# Altium PCB AT short bus ( 7 x 4.8 inches).PCBDOC
Units mil, origin at the board's own origin, x right, y up, seen from the top; angles counter-clockwise.
Board outline 7000 x 4800 mil, 10 copper layers (TopLayer, MidLayer1, MidLayer2, MidLayer3, MidLayer4, MidLayer5, MidLayer6, MidLayer7, MidLayer8, BottomLayer); 7 components, 5 nets, 28 pads, 0 vias.
Unrouted connection lines stored in the file: 15.
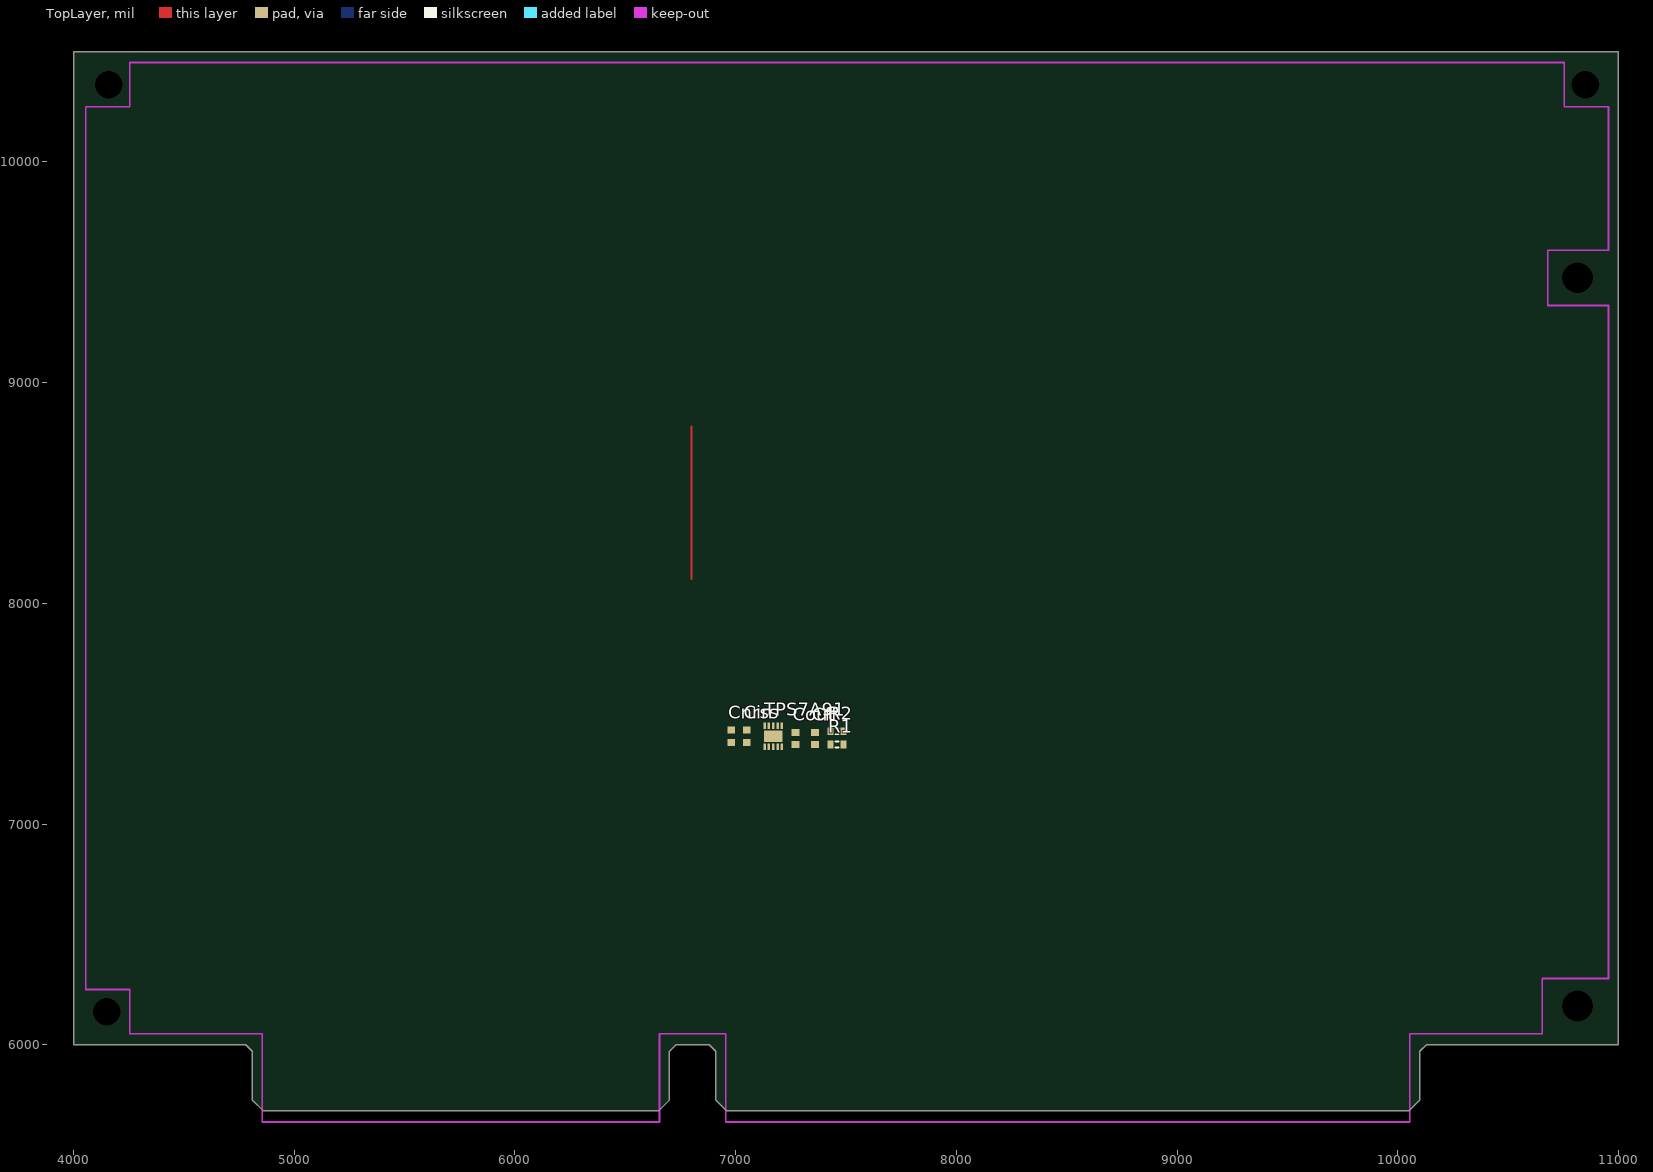
[diagram p0: TopLayer view]
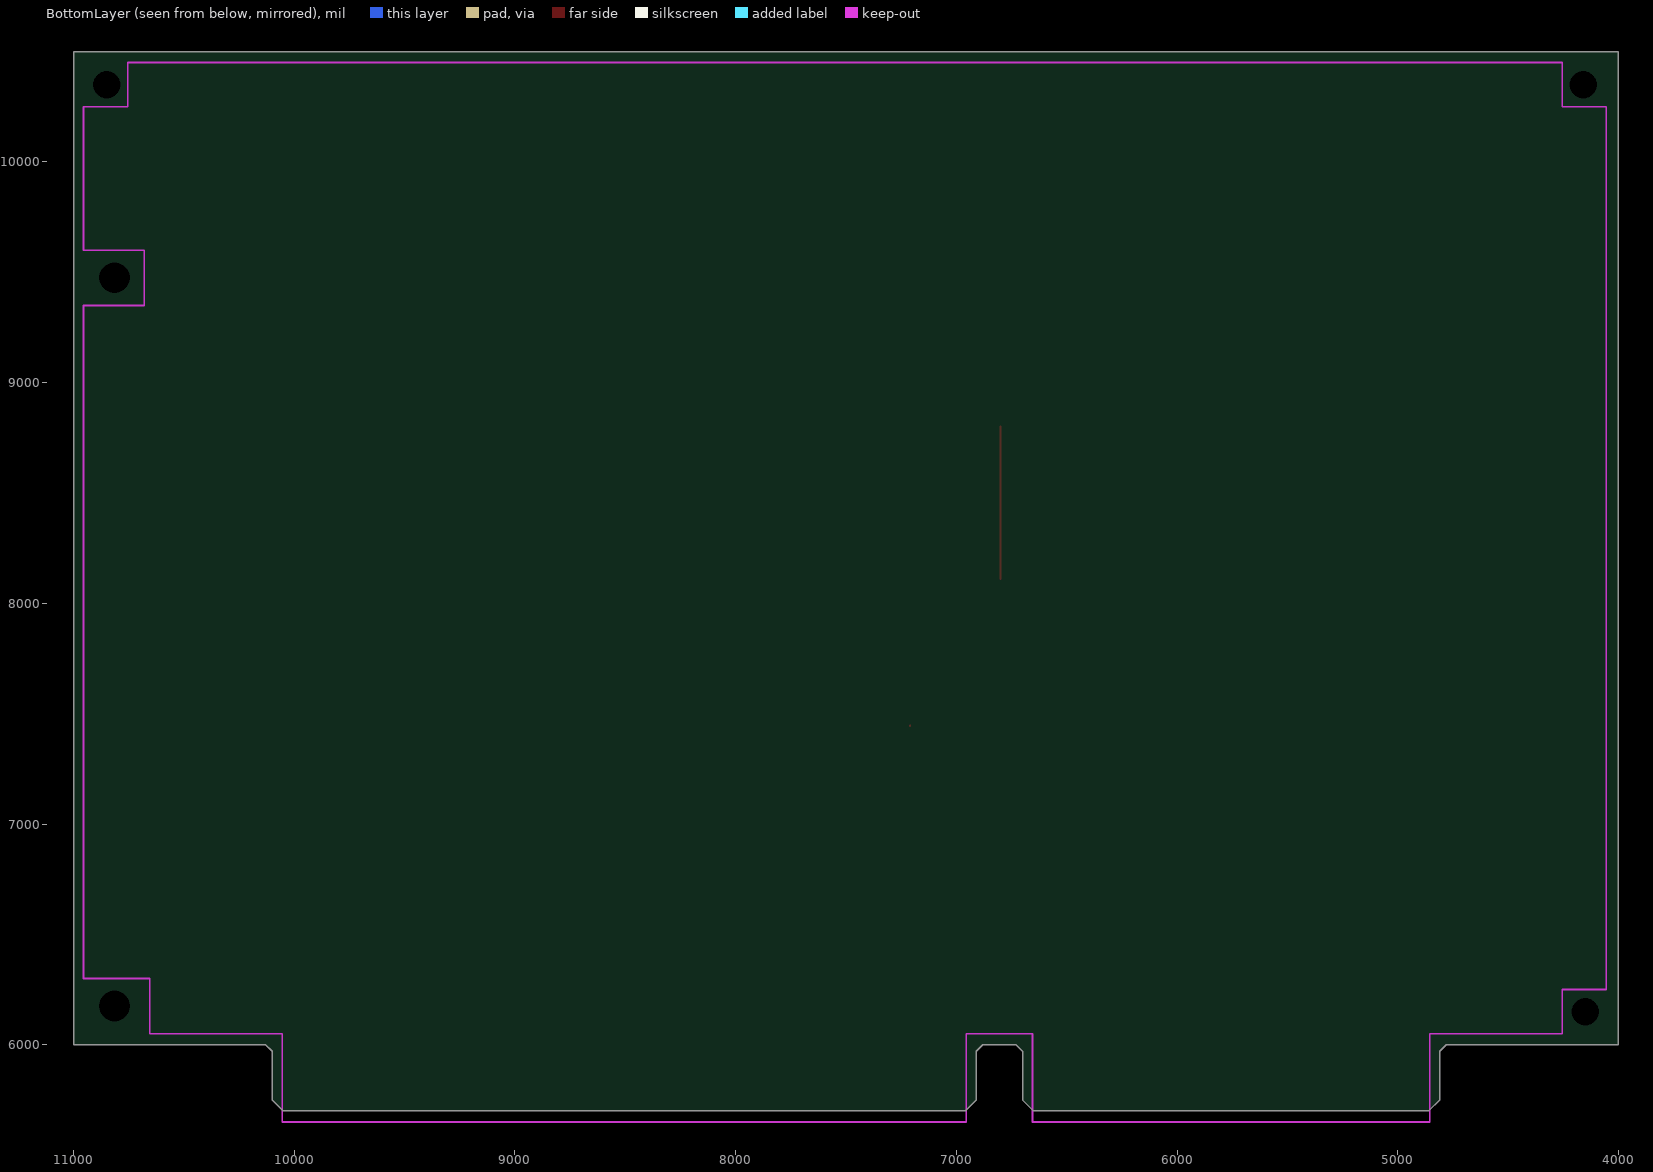
[diagram p1: BottomLayer view, seen from below]
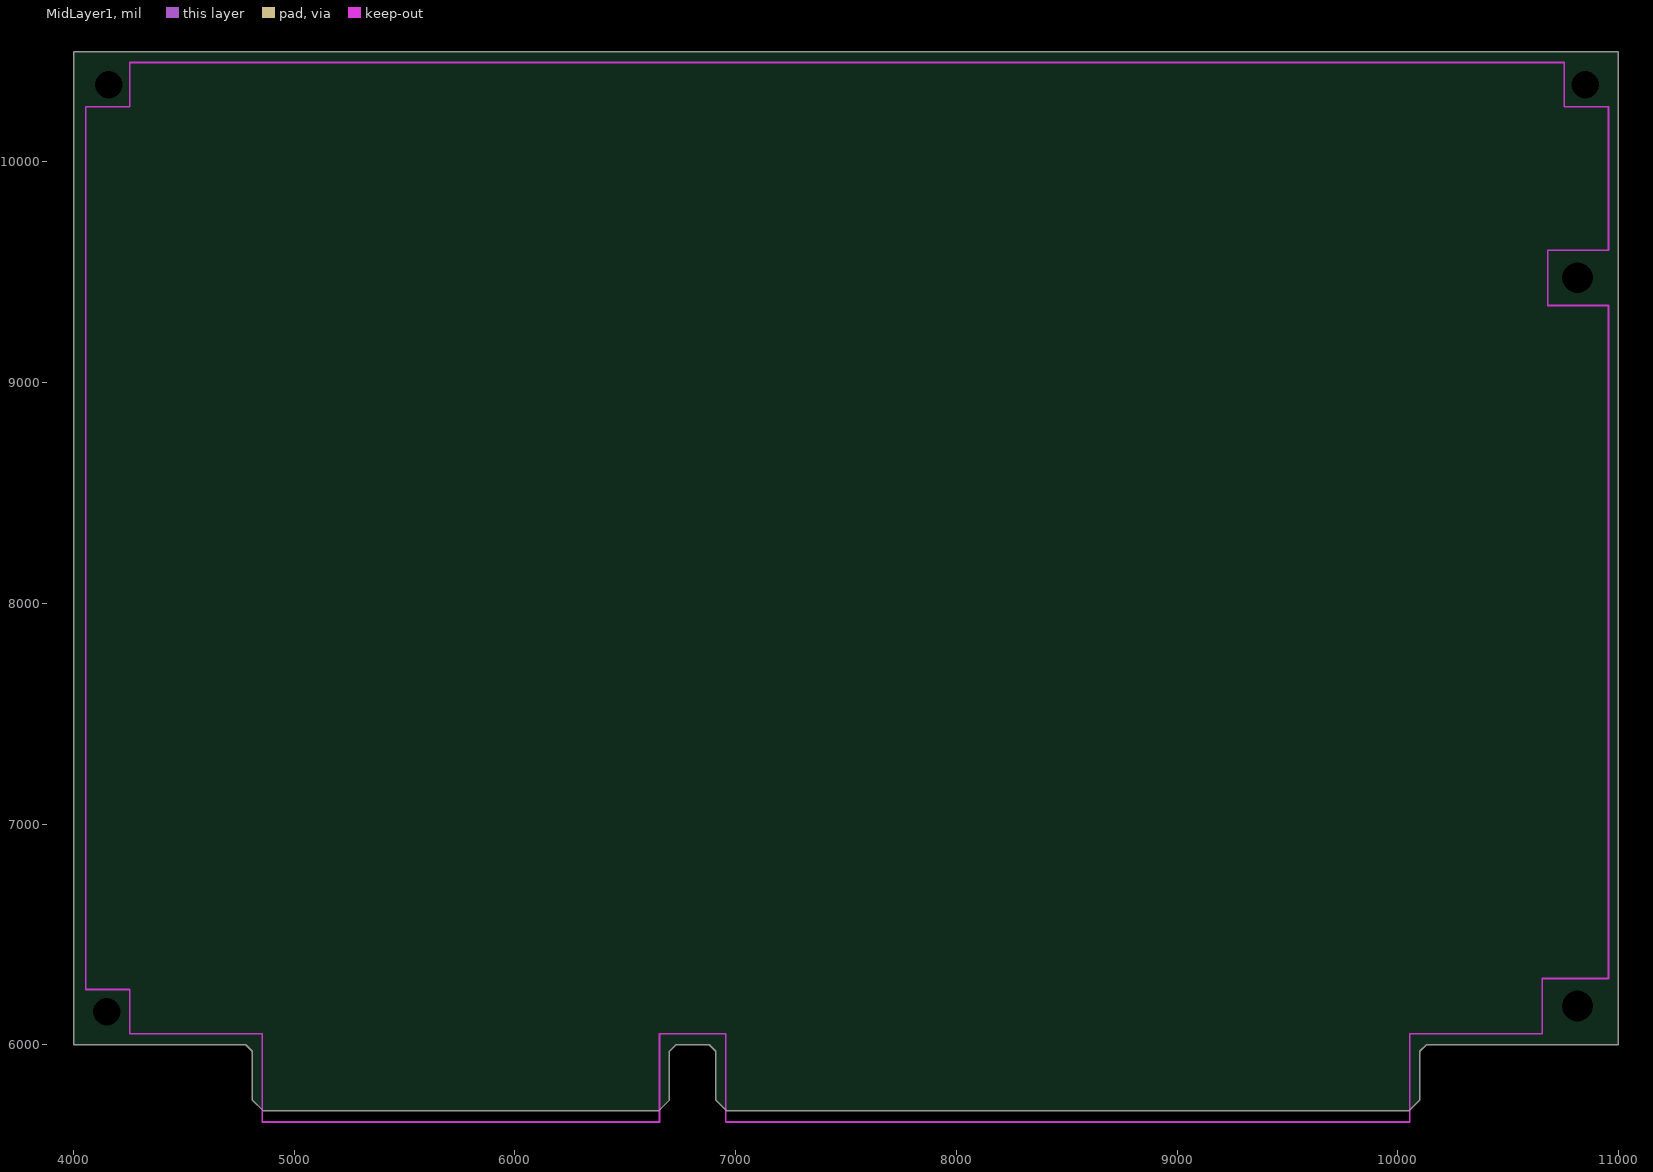
[diagram p2: MidLayer1]
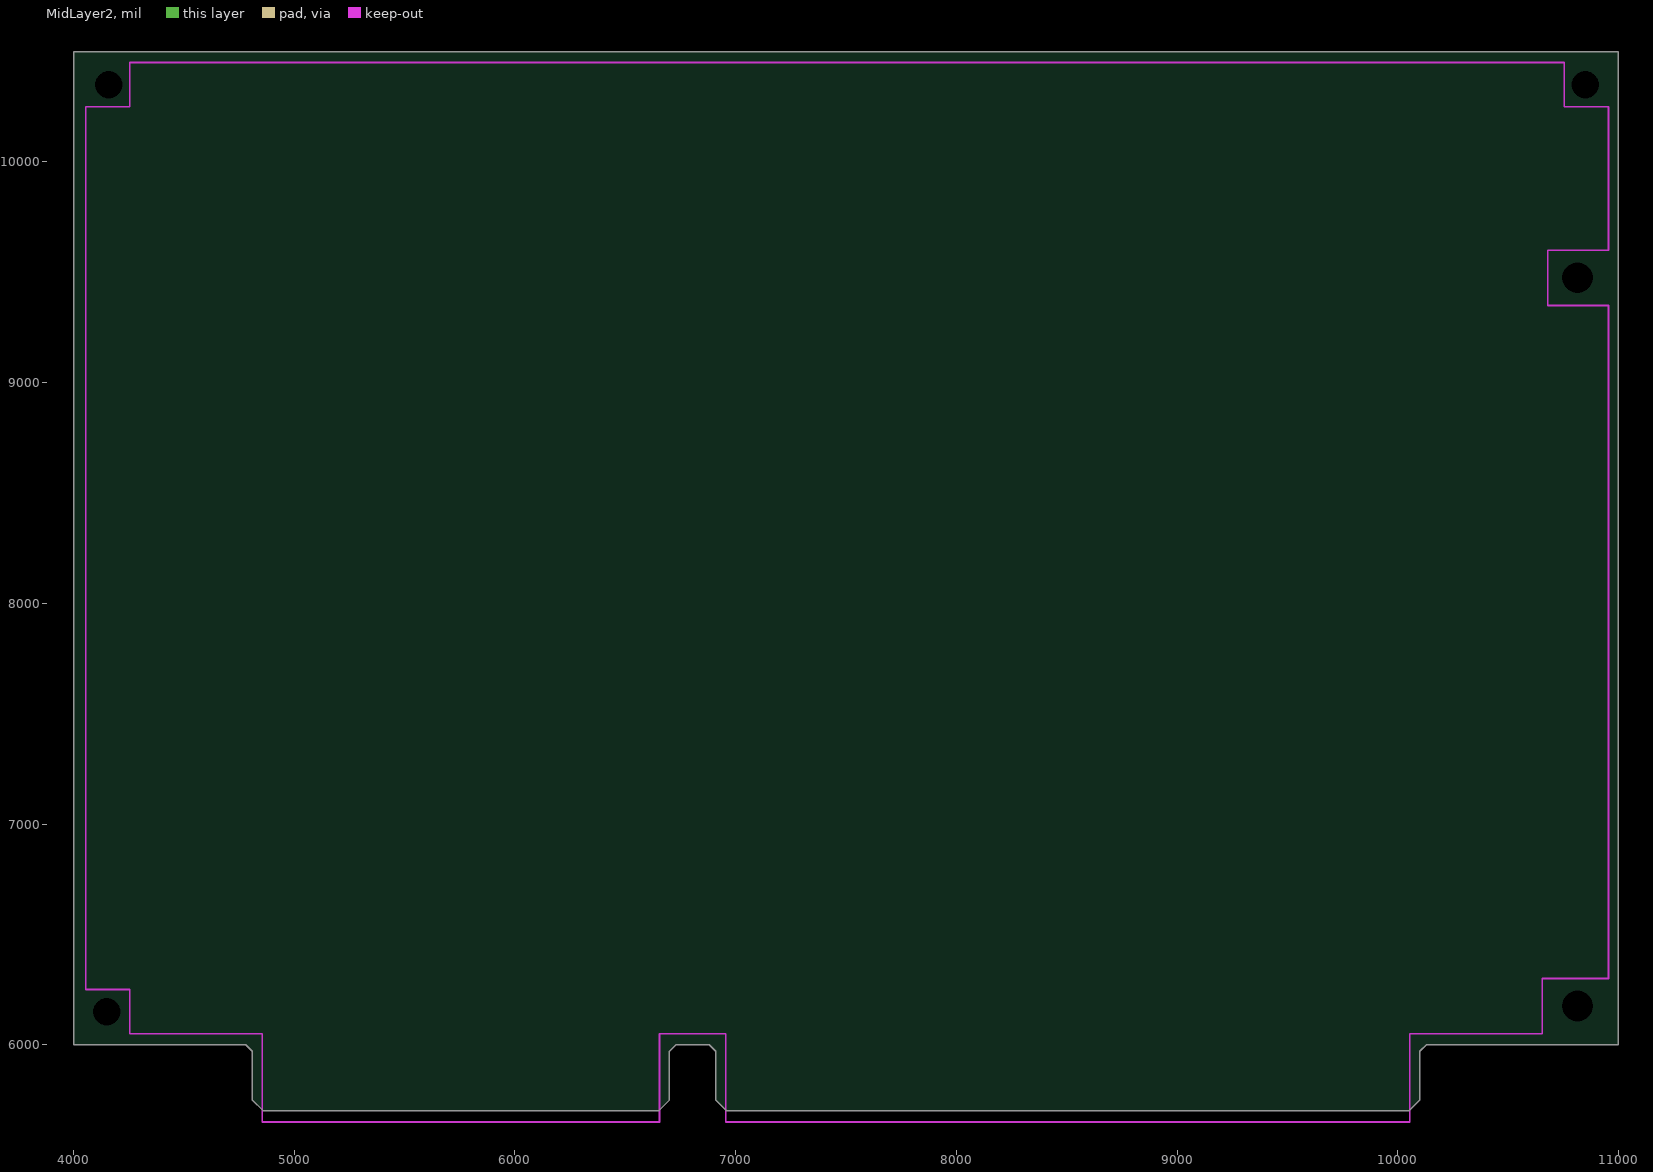
[diagram p3: MidLayer2]
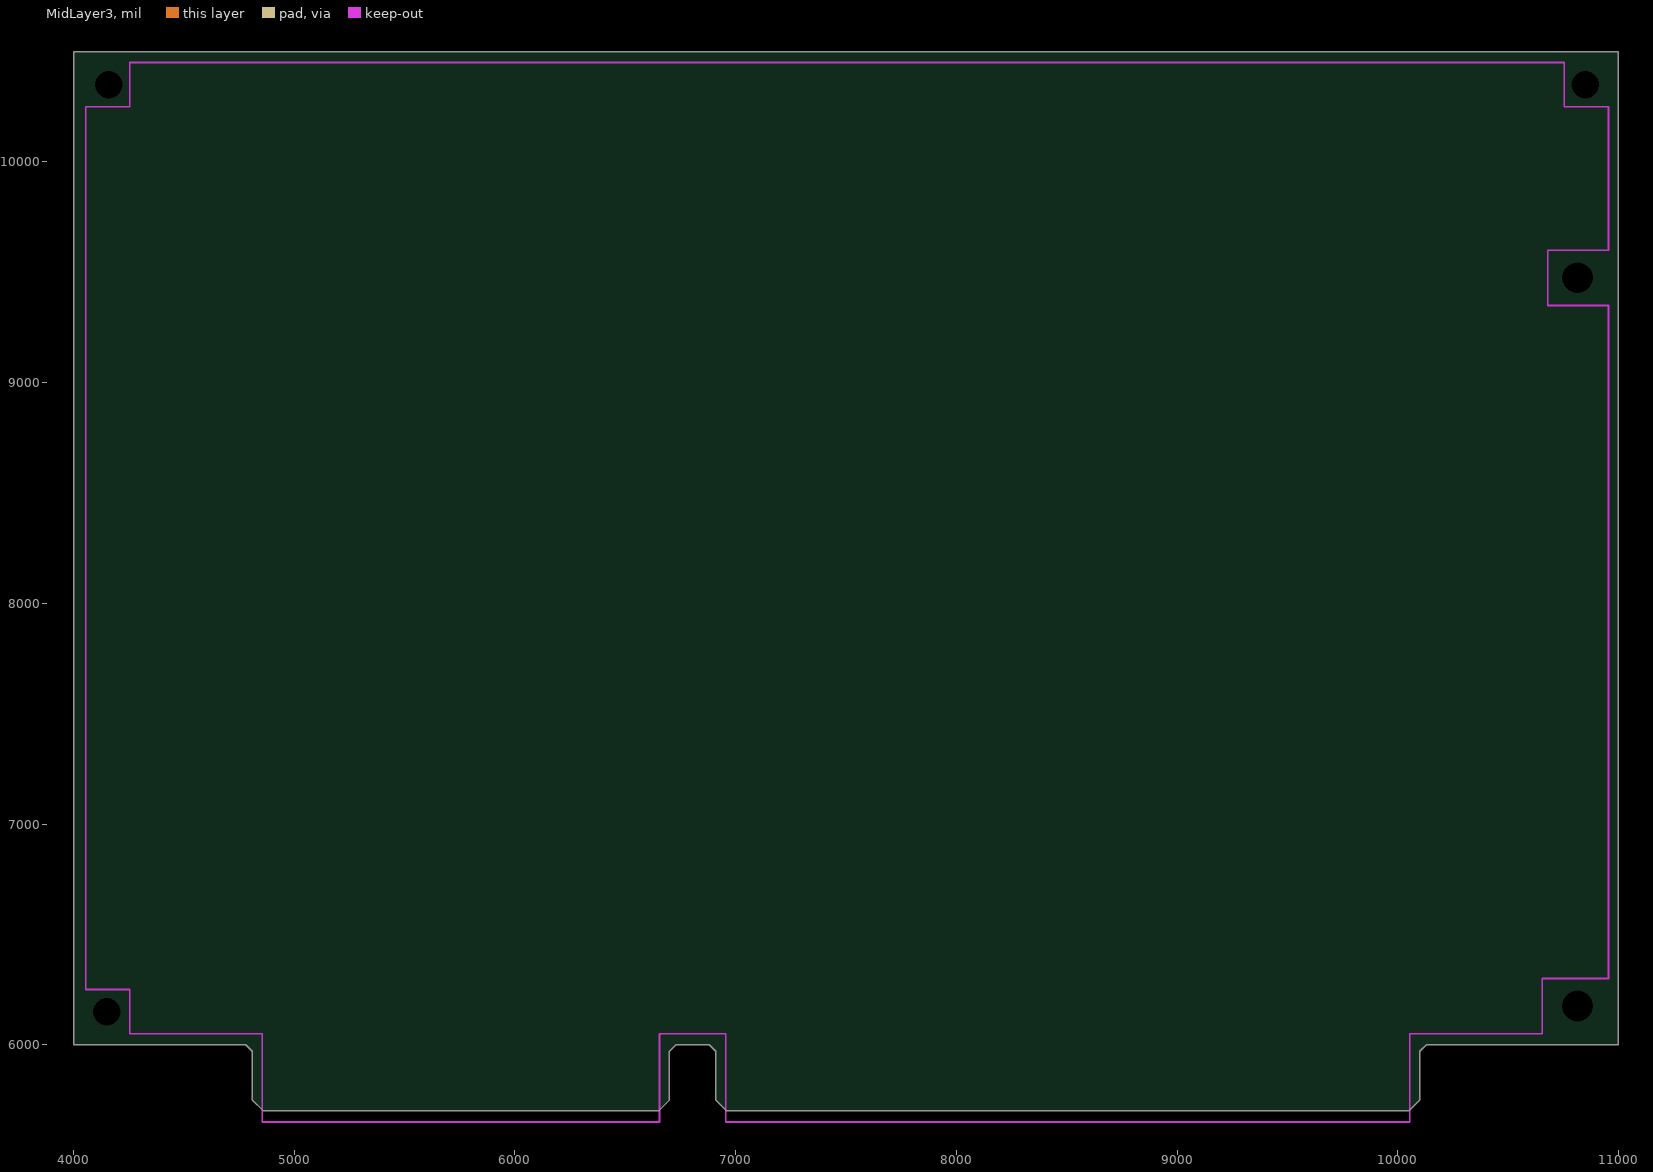
[diagram p4: MidLayer3]
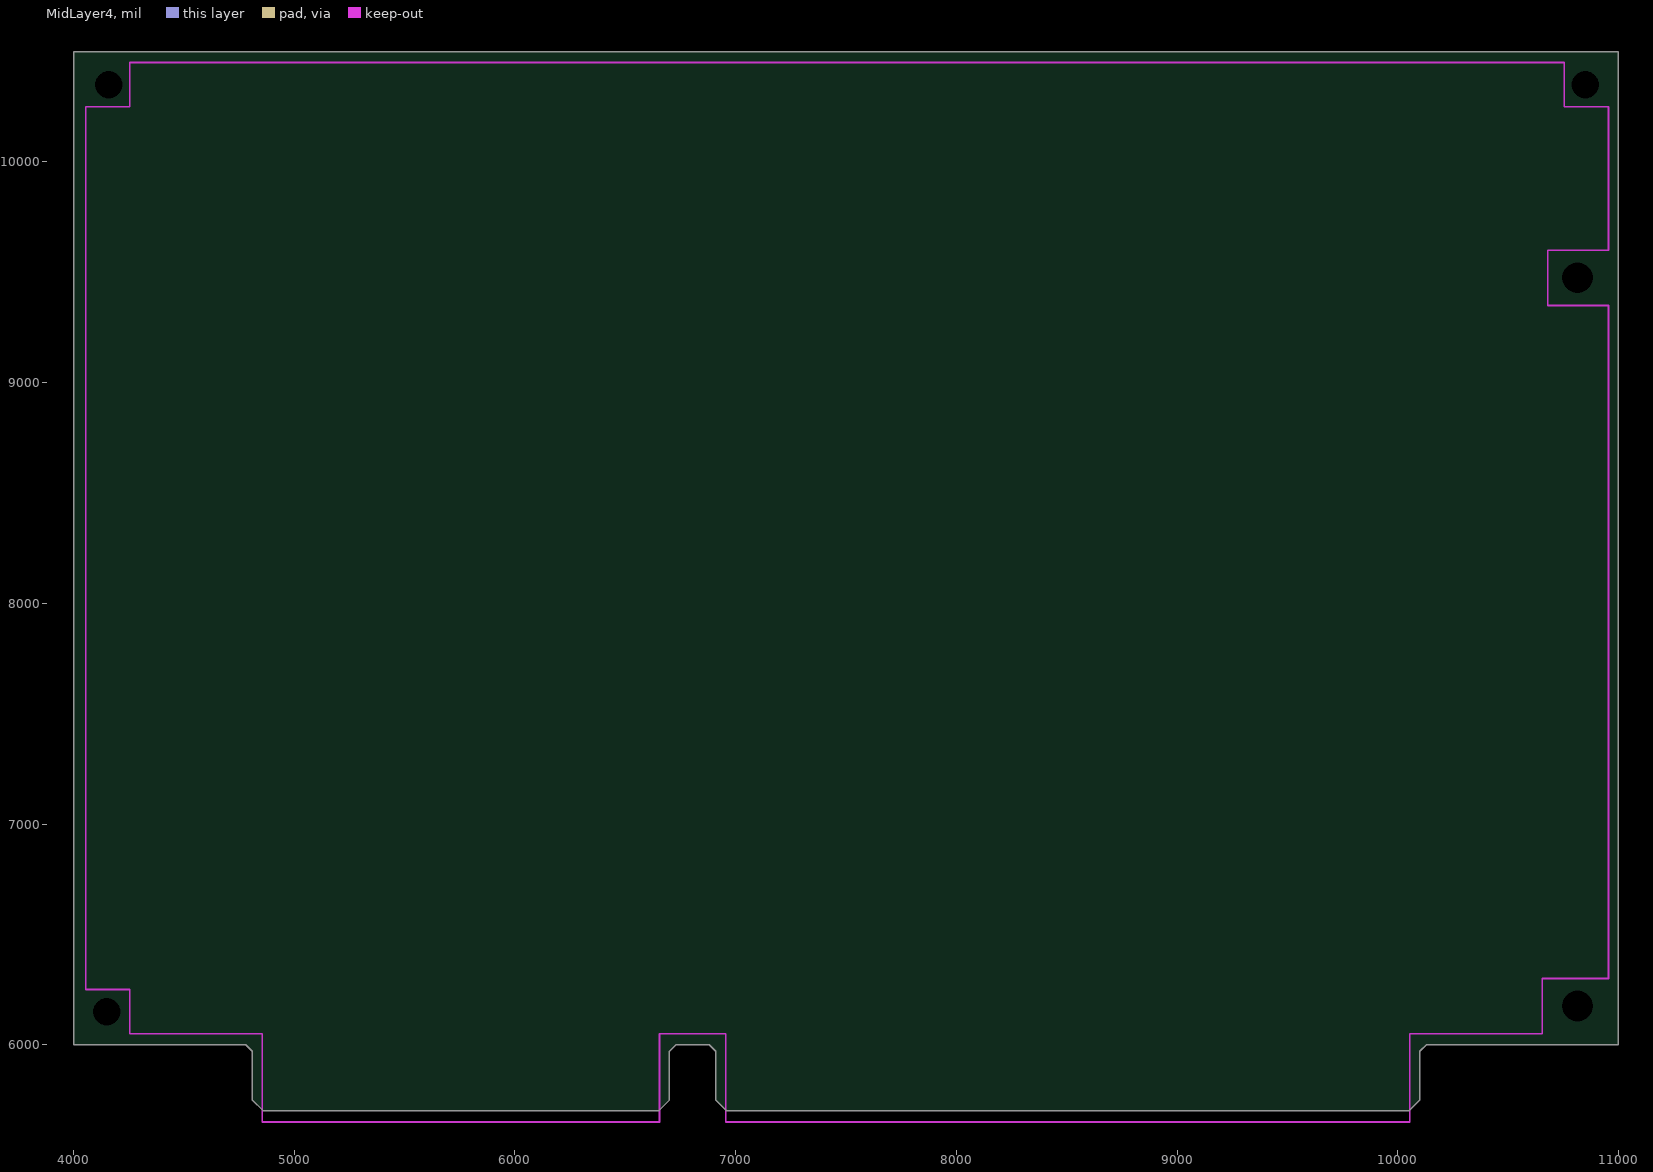
[diagram p5: MidLayer4]
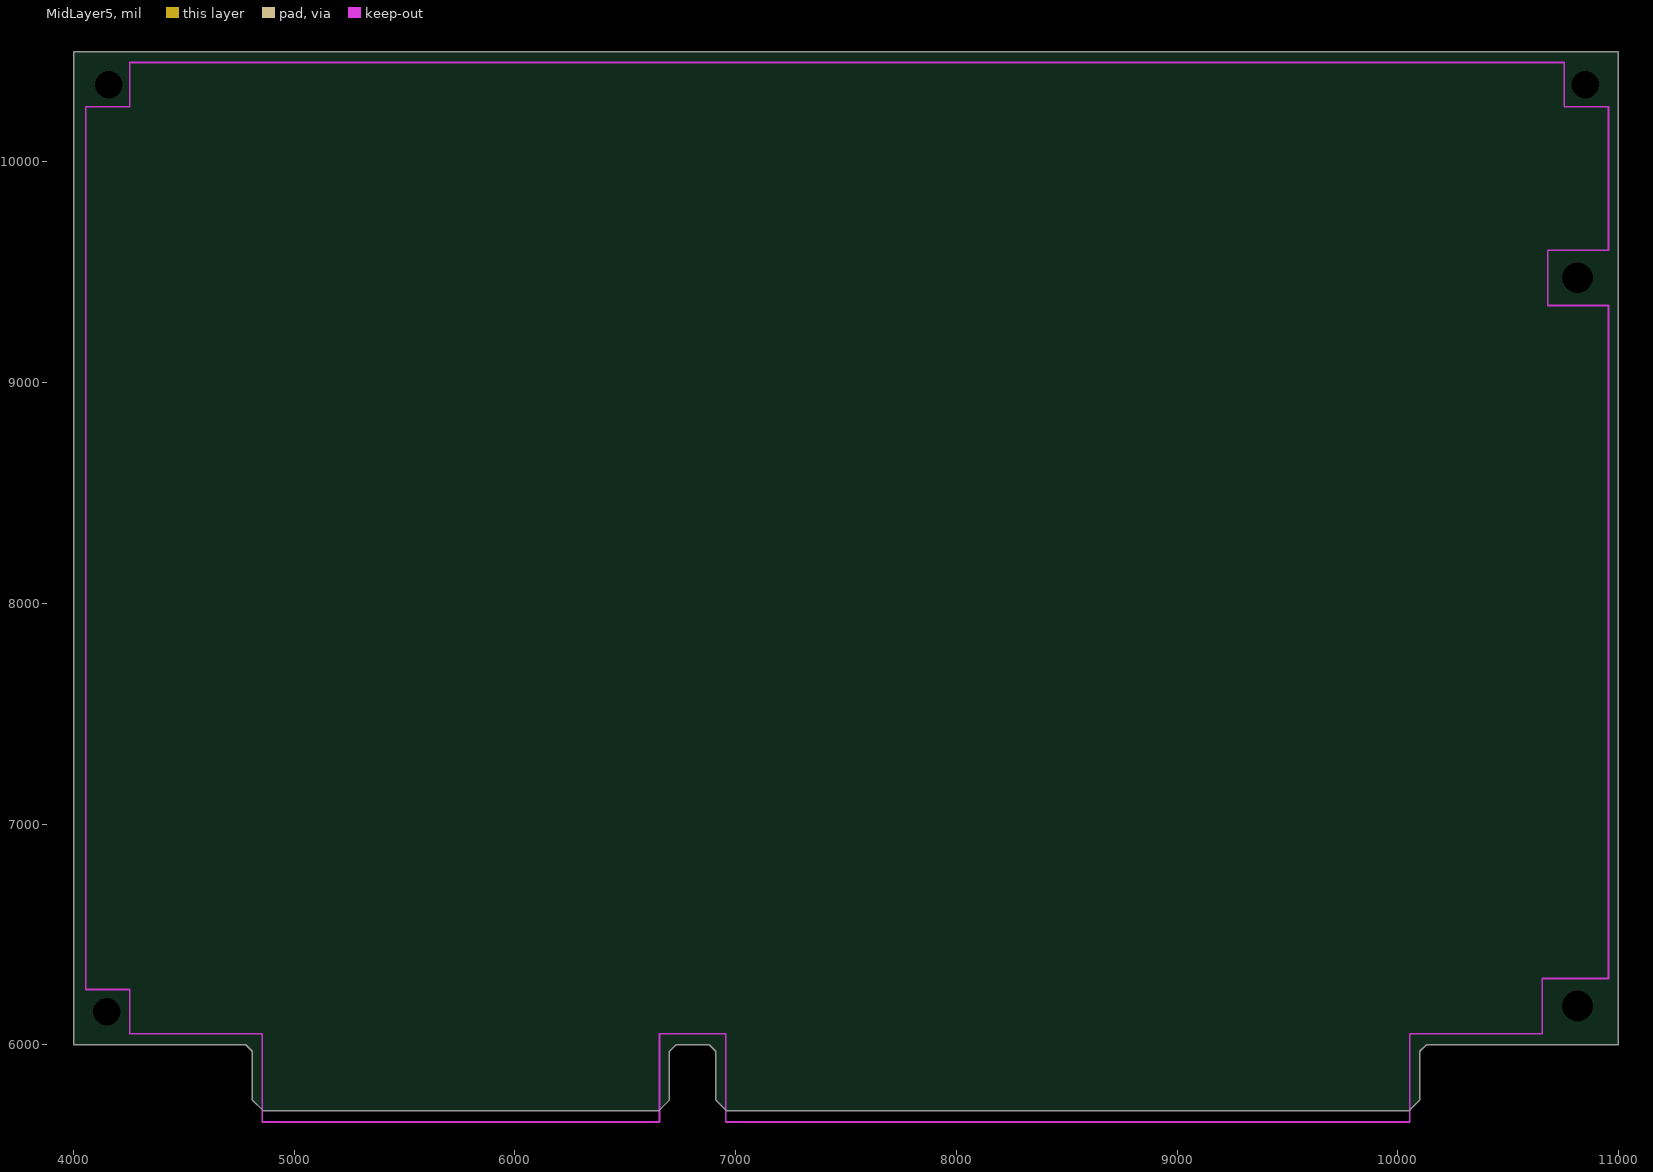
[diagram p6: MidLayer5]
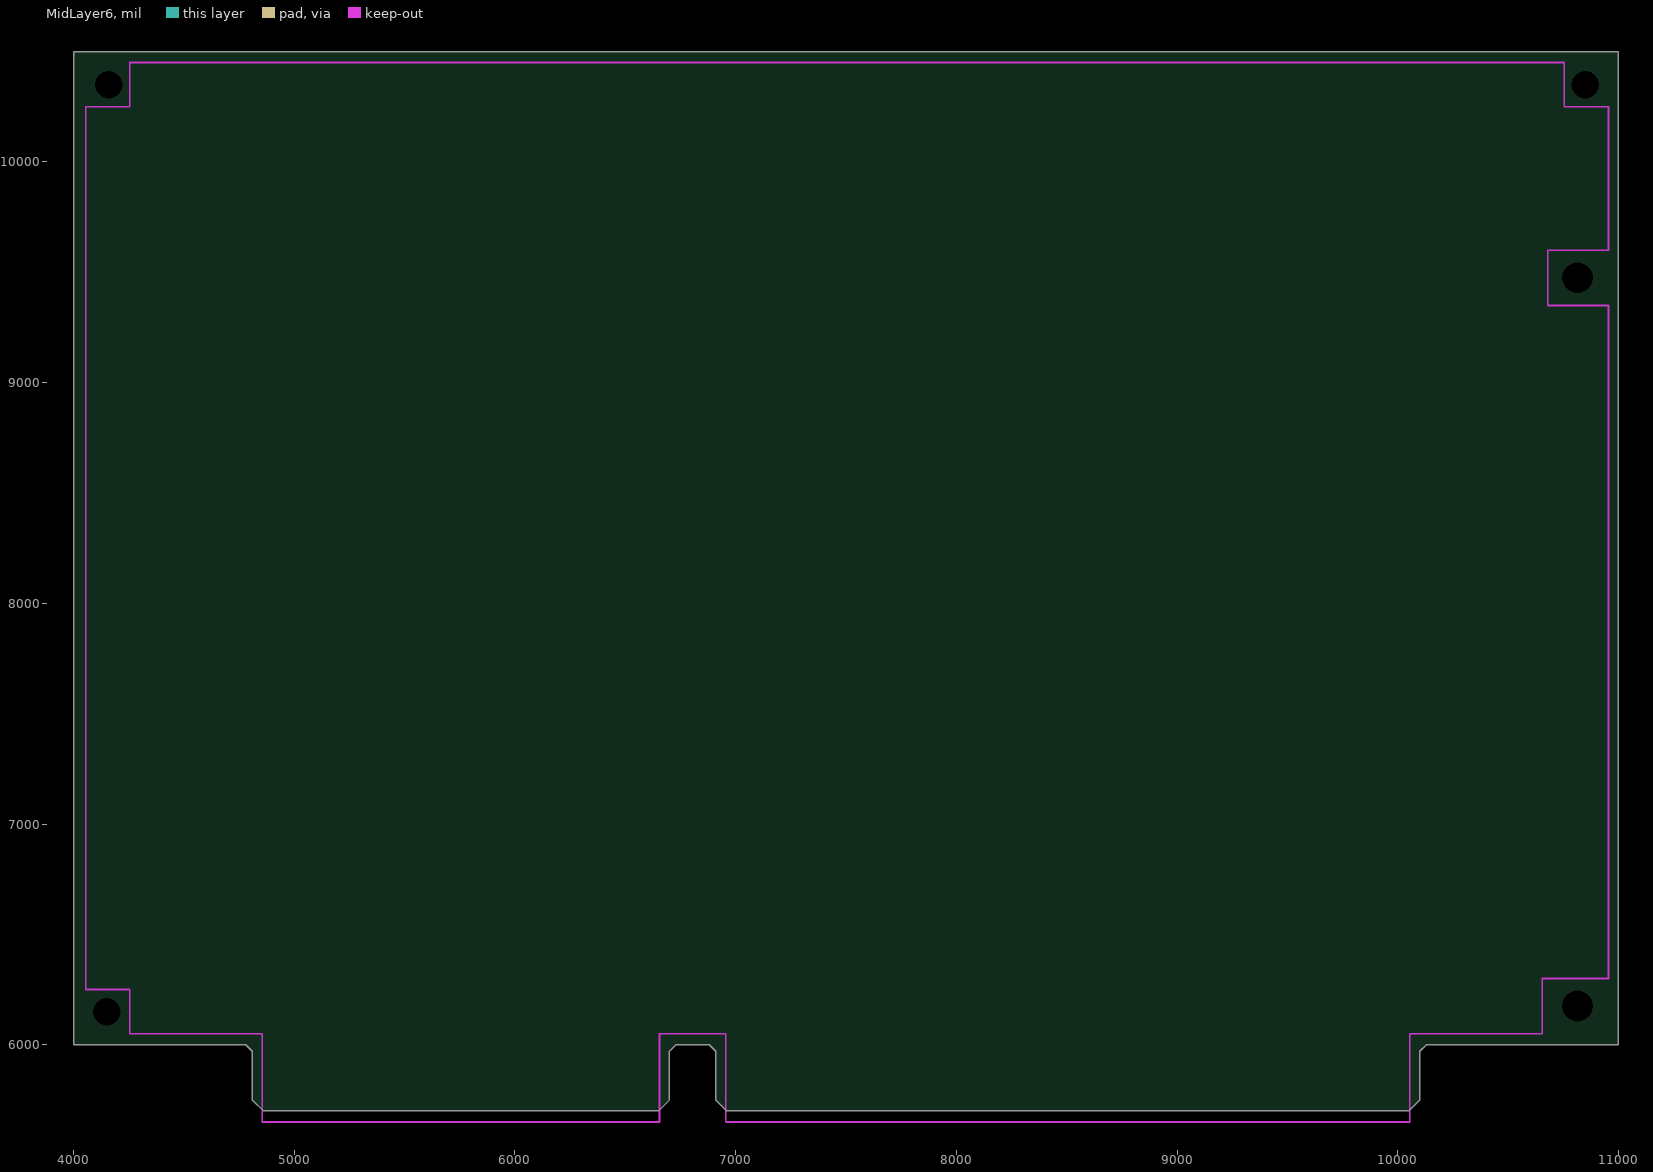
[diagram p7: MidLayer6]
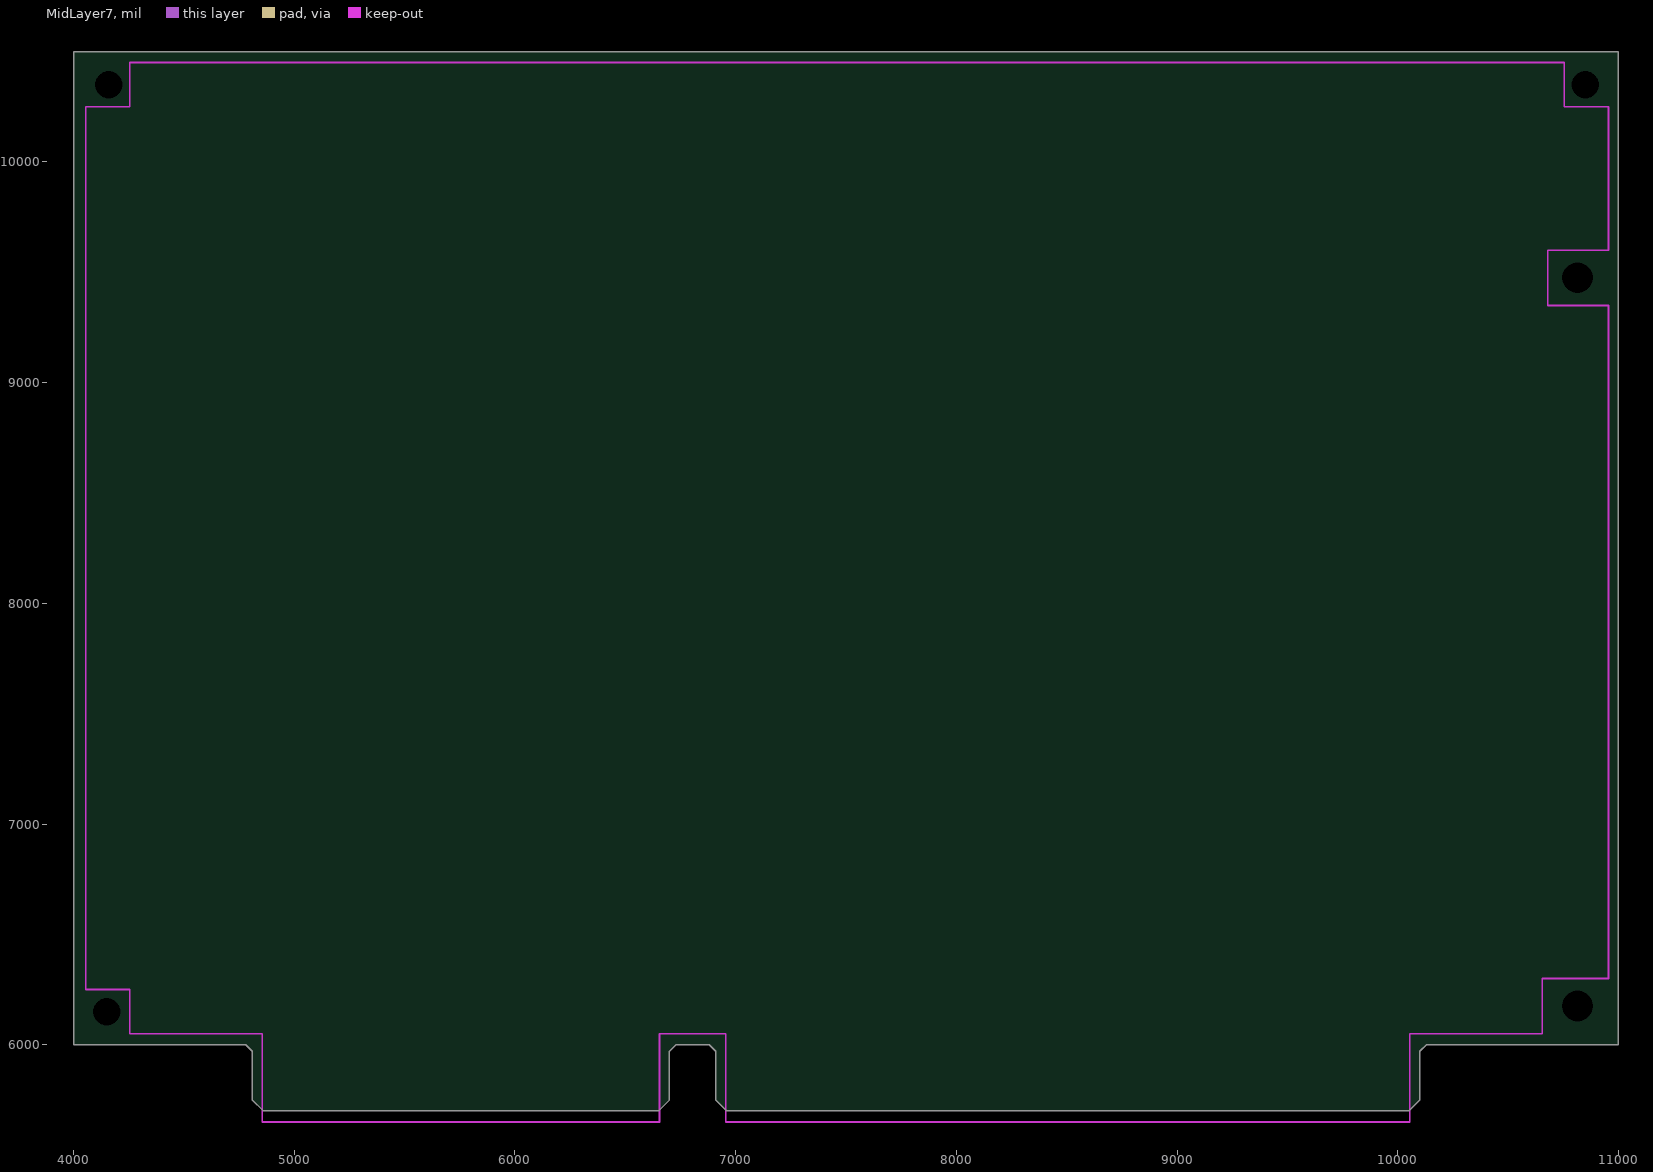
[diagram p8: MidLayer7]
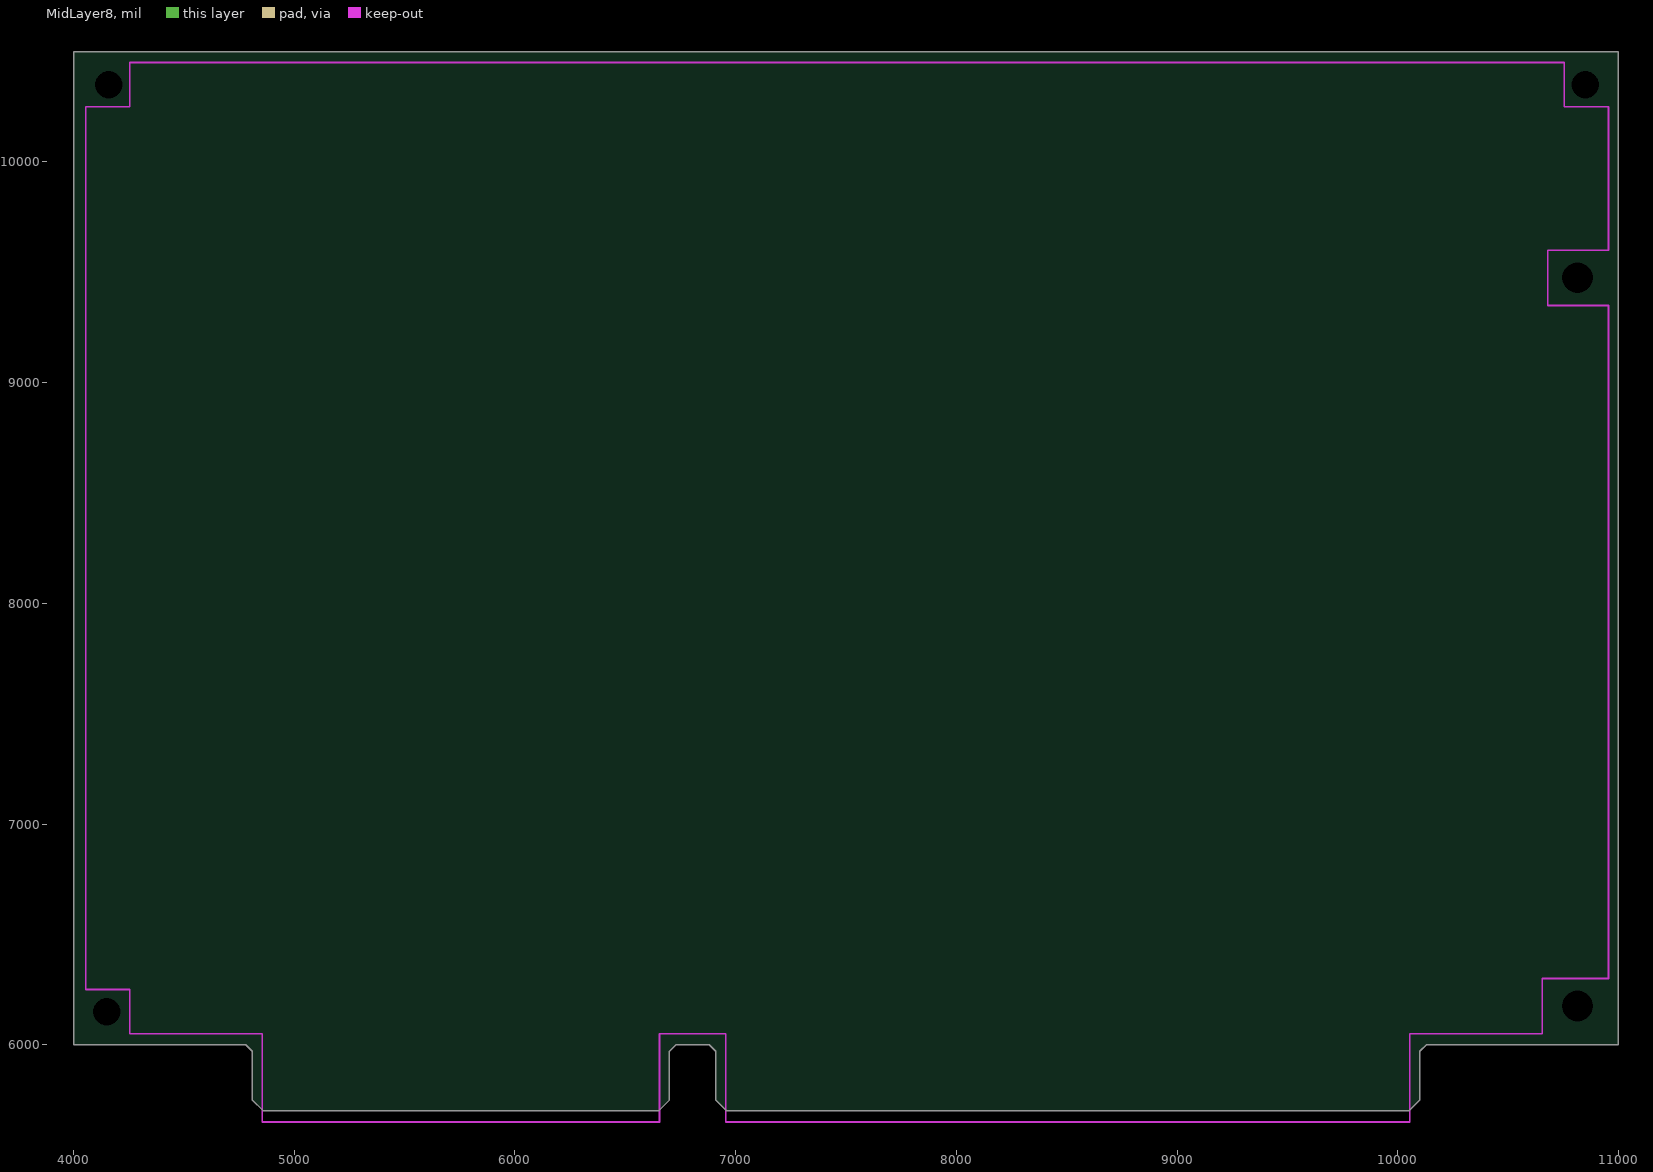
[diagram p9: MidLayer8]

## Layer stack, top to bottom
TopSolder: solder mask 0.4, Solder Resist, Dk 3.5
TopLayer: signal copper 1.4
Dielectric1: core 12.6, FR-4, Dk 4.8
MidLayer1: signal copper 1.4
Dielectric2: prepreg 12.6, FR-4, Dk 4.8
MidLayer2: signal copper 1.4
Dielectric3: core 12.6, FR-4, Dk 4.8
MidLayer3: signal copper 1.4
Dielectric4: prepreg 12.6, FR-4, Dk 4.8
MidLayer4: signal copper 1.4
Dielectric5: core 12.6, FR-4, Dk 4.8
MidLayer5: signal copper 1.4
Dielectric6: prepreg 12.6, FR-4, Dk 4.8
MidLayer6: signal copper 1.4
Dielectric7: core 12.6, FR-4, Dk 4.8
MidLayer7: signal copper 1.4
Dielectric8: prepreg 12.6, FR-4, Dk 4.8
MidLayer8: signal copper 1.4
Dielectric9: core 12.6, FR-4, Dk 4.8
BottomLayer: signal copper 1.4
BottomSolder: solder mask 0.4, Solder Resist, Dk 3.5

## Board outline
4000,6000 4780,6000 4810,5970 4810,5750 4860,5700 6650,5700 6700,5750 6700,5970 6730,6000 6880,6000 6910,5970 6910,5750 6960,5700 10050,5700 10100,5750 10100,5970 10130,6000 11000,6000 11000,10500 4000,10500

## Design rules (kind name [scope] priority, off if disabled: settings)
Clearance [All] p1: gap=10 ignorepadtopadclearanceinfootprint=FALSE except(0: Arc-Hole Track-Hole SMDPad-Hole THPad-Hole Via-Hole Fill-Hole Poly-Hole Region-Hole Text-Hole)
FabricationTestPointUsage TestPointUsage [All] p1: valid=0 allowmultiple=FALSE
FabricationTestpoint Testpoint [All] p1: side=3 testpointundercomponent=TRUE minsize=40 maxsize=100 preferedsize=60 minholesize=20 maxholesize=40 preferedholesize=32 testpointgrid=1 allowsidetop=TRUE allowsidebottom=TRUE usegrid=TRUE gridtolerance=0.01
PasteMaskExpansion PasteMaskExpansion_1 [InComponent('P1')] p1: expansion=-150
PasteMaskExpansion [All] p2: expansion=0
PlaneClearance [All] p1: clearance=10
PolygonConnect [All] p1: connectstyle=Relief reliefconductorwidth=10 reliefentries=4 polygonreliefangle="90 Angle" airgapwidth=10
RoomDefinition "AT short bus ( 7 x 4.8 inches)" [InComponentClass('AT short bus ( 7 x 4.8 inches)')] p1: confinementstyle=ConfineIn formatcopy=TRUE lockcomponents=FALSE outline 6440.47,7307.56 8230.47,7307.56 8230.47,7557.56 6440.47,7557.56
RoutingVias [All] p1: holewidth=28 width=50 viastyle="Through Hole" minholewidth=28 minwidth=50 maxholewidth=28 maxwidth=50
SilkToSolderMaskClearance SilkscreenOverComponentPads [IsPad] p1: minsilkscreentomaskgap=10 clearancetoexposedcopper=TRUE
SolderMaskExpansion [All] p1: expansion=2
Width [All] p1: maxlimit=10 minlimit=10 preferedwidth=10
25 further rules are at their usual default settings.

## Components (designator, comment, footprint, x,y, rotation, side; value= is the part's Value field where it differs from the comment)
Cff "Cap Semi" 1608[0603] 7360,7387.56 r90 top value=10nF
Cin "Cap Semi" 1608[0603] 7050,7397.56 r90 top value=10uF
Cnrss "Cap Semi" 1608[0603] 6980,7397.56 r90 top value=100nF
Cout "Cap Semi" 1608[0603] 7271.47,7388 r90 top value=10uF
R1 "Res3" J1-0603 7459.53,7360 r0 top value=3k57
R2 "Res3" J1-0603 7459.53,7420 r0 top value=1K15
TPS7A91 "TPS63030DSKT" SON50P260X260X80-11N 7170.47,7397.56 r90 top

## Footprints (in the part's own frame and the unit in brackets; to place one, negate y for a bottom-side part, rotate by r counter-clockwise, add the part's x,y. Pads: shape width x height; smd on the part's side, far side on the other; paste and mask are expansions set on the pad)
1608[0603] [mm] "Chip Capacitor, Body 1.6x0.8mm, IPC High Density"
  rect 0.8x0.9 smd: 1(-0.7,0) 2(0.7,0)
  body extent -0.87,-0.48 0.87,0.48, height 1.3
J1-0603 [mm] "Chip Resistor, Body 1.6x0.8mm, IPC High Density"
  rect 0.7x0.9 smd: 1(-0.75,0) 2(0.75,0)
  silkscreen extent -0.2,-0.35 0.2,0.35, body extent -0.85,-0.48 0.85,0.48, height 0.9
SON50P260X260X80-11N [mil]
  rect 30x12 smd paste-1000 mask-1000: 1(-48,39) 2(-48,20) 3(-48,0) 4(-48,-20) 5(-48,-39) 6(48,-39) 7(48,-20) 8(48,0) 9(48,20) 10(48,39)
  rect 51x83 smd paste-1000 mask-1000: 11(0,0)

## Part data
Cff Cin Cnrss Cout: "Capacitor (Semiconductor SIM Model)", LatestRevisionDate=29-May-2009, LatestRevisionNote="IPC-7351 Footprint Added.", PackageDescription="Chip Capacitor", PackageReference=C1206, Published=8-Jun-2000, Publisher="Altium Limited"
R1 R2: "Resistor", LatestRevisionDate=29-May-2009, LatestRevisionNote="IPC-7351 Footprint Added.", PackageDescription="Chip Resistor", PackageReference=J1-0603, Published=8-Jun-2000, Publisher="Altium Limited"
TPS7A91: "TPS7A91 (ACTIVE)  1-A, High Accuracy, Low Noise LDO Voltage Regulator", Package="WSON-10 Texas Instruments", Availability=Good, MF="Texas Instruments", MP=TPS63030DSKT, Price="1.51 USD"

## Free pads (board coordinates)
  round 50 hole 140: 1(10815,6175) 2(10815,9475)
  round 50 hole 125: 3(10850,10350) 4(4160,10350) 5(4150,6150)

## Nets (pads, with @x,y where several pads share a name; then routed paths per layer and width w, separated by ;. In a path a pad name is that pad's centre, name@x,y a point inside that pad or via, vN(x,y) a via of type N, cw(c..) or ccw(c..) an arc to the next point about the centre after c; other vN are vias at no path point)
GND: Cin.1 Cnrss.1 Cout.1 R2.1 TPS7A91.4
NetCff_1: Cff.1 R1.1 R2.2 TPS7A91.3
NetCff_2: Cff.2 Cout.2 R1.2 TPS7A91.1
NetCin_2: Cin.2 TPS7A91.6 TPS7A91.7 TPS7A91.9 TPS7A91.10 | length 0.7
  TopLayer w10: TPS7A91.6 TPS7A91.6@7210,7446.09
NetCnrss_2: Cnrss.2 TPS7A91.8
pads on no net: TPS7A91.2 TPS7A91.5 TPS7A91.11
copper on no net: | length 690
  TopLayer w10: 6800,8110 6800,8800

## Keep-outs
KeepOutLayer:
  lines w8: 4055,6250 4255,6250 4255,6050 4855,6050 4855,5650 6655,5650 6655,6050 6955,6050 6955,5650 10055,5650 10055,6050 10655,6050 10655,6300 10955,6300 10955,9350 10680,9350 10680,9600 10955,9600 10955,10250 10755,10250 10755,10450 4255,10450 4255,10250 4055,10250 4055,6250

## Other copper
TopLayer:
  text ".GTL" at 10700,10650 h90
MidLayer1:
  text ".G1" at 10700,10650 h90
MidLayer2:
  text ".G2" at 10700,10650 h90
MidLayer3:
  text ".G3" at 10700,10650 h90
MidLayer4:
  text ".G4" at 10700,10650 h90
MidLayer5:
  text ".G5" at 10700,10650 h90
MidLayer6:
  text ".G6" at 10700,10650 h90
MidLayer7:
  text ".G7" at 10700,10650 h90
MidLayer8:
  text ".G8" at 10700,10650 h90
BottomLayer:
  text "P/N XXXXXX-XXX REV A" at 5320,10700 h75
  text ".GBL" at 10700,10650 h90

## Silkscreen, mask and mechanical layers (free items; w line width, h text height)
TopOverlay:
  rectangle: 4281,11193 5031,11393
  rectangle: 4281,10903 5031,11103
  lines w10: 5392.59,11295.97 ccw(c5441,11335.5) 5392.71,11295.83
  text "C" at 5496,11298 h60
  text "2002 COMPANY NAME" at 5646,11298 h75
  text "S/N" at 4031,11250.5 h75
  text "BOARD NAME" at 5496,11123 h75
  text "ASSY NO.: XXXXXX" at 5496,10973 h75
  text "REV" at 4031,10953 h75
  text ".GTO" at 10700,10650 h90
TopPaste:
  text ".GTP" at 10700,10650 h90
BottomPaste:
  text ".GBP" at 10700,10650 h90
TopSolder:
  rectangle: 6885,5675 10125,6005
  rectangle: 4785,5675 6725,6005
  text ".GTS" at 10700,10650 h90
BottomSolder:
  rectangle: 4785,5675 6725,6005
  rectangle: 6885,5675 10125,6005
  text ".GBS" at 10700,10650 h90
Mechanical1:
  the board outline again, w20
Mechanical3:
  lines w10: 10690,6125 10690,6075 10740,6075 ; 10690,6150 10690,6200 ; 10690,6225 10690,6275 10740,6275 ; 10690,9425 10690,9375 10740,9375 ; 10690,9450 10690,9500 ; 10690,9525 10690,9575 10740,9575 ; 10765,6075 10815,6075 ; 10765,6275 10815,6275 ; 10765,9375 10815,9375 ; 10765,9575 10815,9575 ; 10840,6075 10890,6075 ; 10840,6275 10890,6275 ; 10840,9375 10890,9375 ; 10840,9575 10890,9575 ; 10915,6075 10965,6075 ; 10915,6275 10965,6275 ; 10915,9375 10965,9375 ; 10915,9575 10965,9575 ; 11000,6075 11040,6075 11040,4925 11065,4925 11065,9650 11490,9650 11490,9675 11040,9675 11040,9575 11000,9575 ; 11000,6275 11040,6275 11040,9375 11000,9375
Mechanical4:
  circle w10: c4845.67,5719.32 r100
  lines w10: 12120,7695 12195,7620 12270,7695 12345,7620 12420,7695 12495,7620 12570,7695 ; 12601.25,6613.75 12845,6370 13045,6370 ; 13745,7820 14470,7820 ; 15095,6370 14845,6370 15138.75,6663.75 ; 16045,6570 16045,6970 16245,7070 15845,7170 16045,7270 16045,7670 ; 4703.67,5666.32 4703.67,5721.32 4723.67,5671.32 4703.67,5666.32 ; 4703.87,5721.16 4705,5775 4725.36,5771.79 4703.87,5721.16 ; 12495,6720 12582.5,6595 12620,6632.5 12495,6720 ; 15120,6682.5 15157.5,6645 15245,6770 15120,6682.5
  lines w20: 12145,7670 12145,6770 12245,6670 12445,6670 12545,6770 12545,7670 ; 15145,7670 15145,6870 15345,6670 16045,6670
  text ".Pcb_File_Name_No_Path" at 8800,10840 h90
  text ".Printout_Name" at 8800,10650 h90
  text "DETAIL A" at 13745,7870 h120
  text "o" at 13770,6395 h60
  text "o" at 15820,6395 h60
  text ".020 X 45  CHAMFER" at 13120,6320 h90
  text "0.05 X 45  CHAMFER" at 15170,6320 h90
  text "BOTH SIDES" at 13120,6145 h90
  text "TYP 4 PLCS" at 15170,6145 h90
  text "ENTIRE LENGTH OF" at 13120,5970 h90
  text "EDGE CONNECTOR" at 13120,5795 h90
  text "SEE DETAIL A" at 4210,5690 h50
DrillDrawing:
  text ".LEGEND" at 12050,8550 h90
  text "Drilling Details." at 12050,8400 h90

## Dimensions
4150,5980 to 4000,6000 on Mechanical4
3980,6150 to 4000,6000 on Mechanical4
10150,5700 to 10130,6000 on Mechanical4